# Altium PCB Telespore_Adapter.PcbDoc
Units mm, origin at the board's own origin, x right, y up, seen from the top; angles counter-clockwise.
Board outline 13.9 x 26 mm, 2 copper layers (Top Layer, Bottom Layer), stack 1.57 mm thick; 8 components, 19 nets, 41 pads, 74 vias.
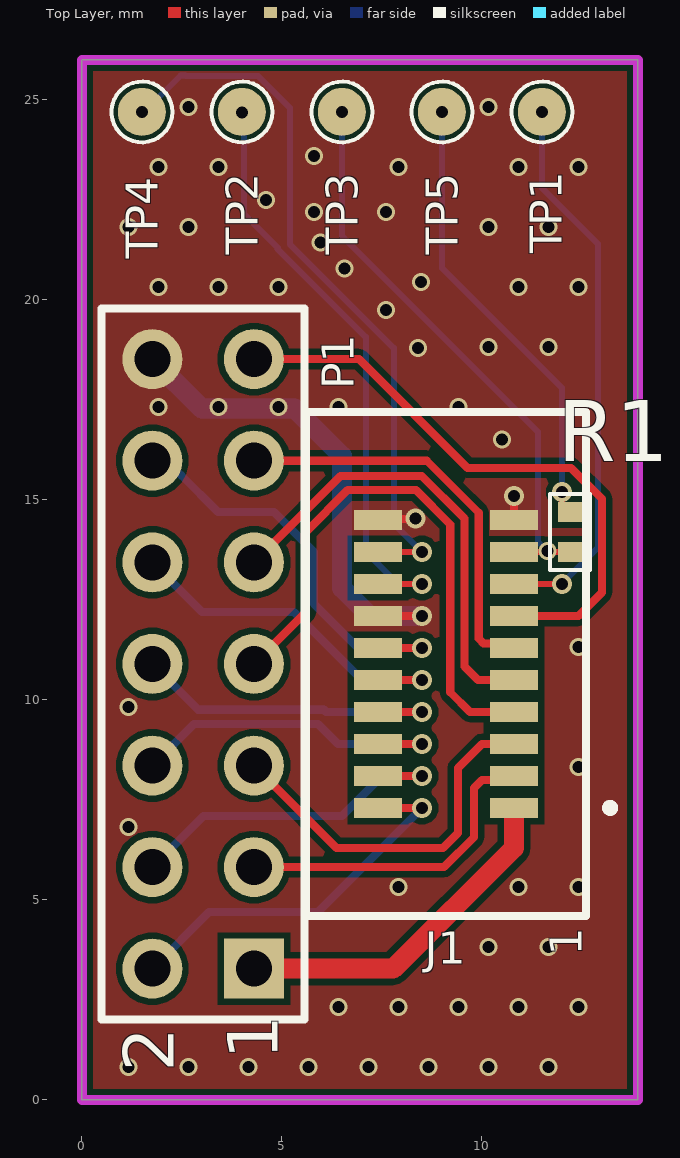
[diagram p0: Top Layer view]
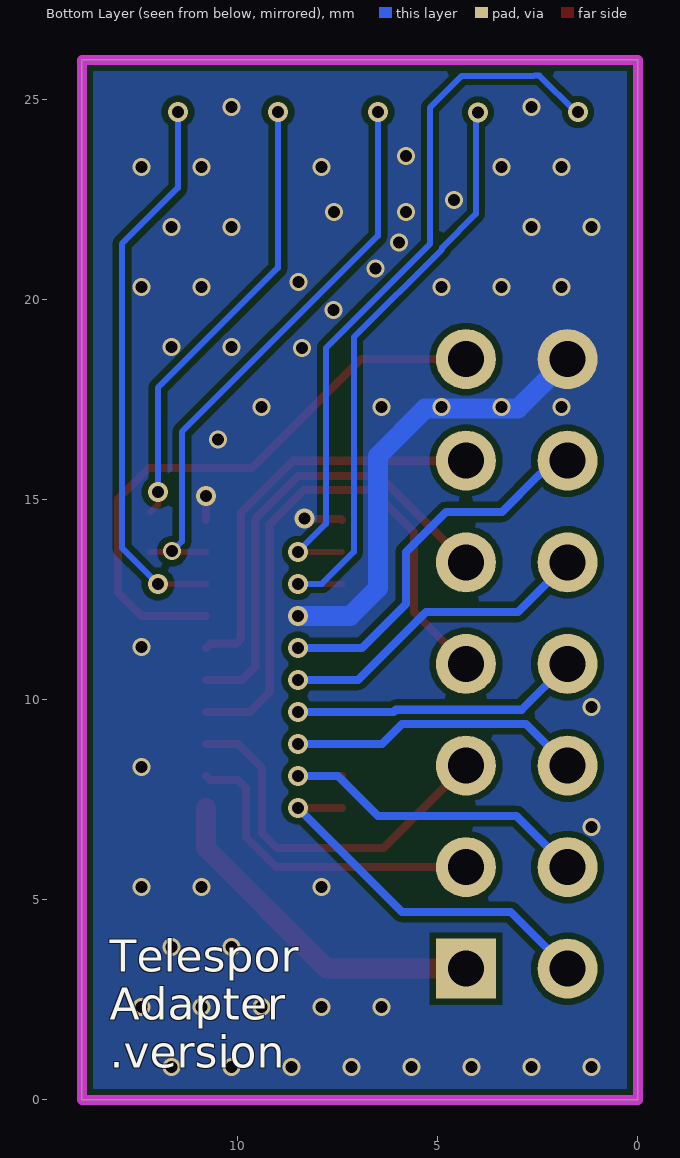
[diagram p1: Bottom Layer view, seen from below]

## Layer stack, top to bottom
Top Solder: solder mask 0.0102, Solder Resist, Dk 3.5
Top Layer: signal copper 0.035
Dielectric2: dielectric 1.5, FR-4, Dk 4.8
Bottom Layer: signal copper 0.035
Bottom Solder: solder mask 0.0102, Solder Resist, Dk 3.5

## Board outline
0,26 13.9,26 13.9,0 0,0

## Design rules (kind name [scope] priority, off if disabled: settings)
Clearance [All] p1: gap=0.152 ignorepadtopadclearanceinfootprint=FALSE except(0.15: SMDPad-SMDPad)
ComponentClearance [All] p1 off: gap=0 collisioncheckmode=3 verticalgap=2540 showdistances=FALSE
DiffPairsRouting [All] p1: maxlimit=0.153 minlimit=0.153 mostfreqgap=0.153 toplayer_minwidth=0.31 toplayer_maxwidth=0.31 toplayer_prefwidth=0.31 bottomlayer_minwidth=0.31 bottomlayer_maxwidth=0.31 bottomlayer_prefwidth=0.31 maxuncoupledlength=12.7
HoleSize [All] p1: absolutevalues=TRUE maxlimit=3 minlimit=0.3 maxpercent=80.000 minpercent=20.000
PolygonConnect [All] p1: connectstyle=Direct reliefconductorwidth=0.254 reliefentries=4 polygonreliefangle="90 Angle" airgapwidth=0.254
RoutingVias [All] p1: holewidth=0.3 width=0.5 viastyle="Through Hole" minholewidth=0.3 minwidth=0.5 maxholewidth=0.3 maxwidth=0.5
SilkToSilkClearance [All] p1: silktosilkclearance=0
SilkToSolderMaskClearance [IsPad] p1: minsilkscreentomaskgap=0.152 clearancetoexposedcopper=TRUE
SolderMaskExpansion [All] p1: expansion=0.102 istentingtop=FALSE
Width [All] p1: maxlimit=3 minlimit=0.152 preferedwidth=0.2
25 further rules are at their usual default settings.

## Components (designator, comment, footprint, x,y, rotation, side; value= is the part's Value field where it differs from the comment)
J1 "HSEC8-110-01-X-DV" SAMTEC_HSEC8-110-01-X-DV 9.1,10.9 r90 top
P1 "Header 7X2" HDR2X7 4.3,3.28 r90 top
R1 "100k" RES0402 12.2,14.2 r270 top
TP1 "TestPoint" TestPoint:1.2x1.2mm 11.5,24.7 r180 top
TP2 "TestPoint" TestPoint:1.2x1.2mm 4,24.7 r180 top
TP3 "TestPoint" TestPoint:1.2x1.2mm 6.5,24.7 r180 top
TP4 "TestPoint" TestPoint:1.2x1.2mm 1.5,24.7 r180 top
TP5 "TestPoint" TestPoint:1.2x1.2mm 9,24.7 r180 top

## Footprints (in the part's own frame and the unit in brackets; to place one, negate y for a bottom-side part, rotate by r counter-clockwise, add the part's x,y. Pads: shape width x height; smd on the part's side, far side on the other; paste and mask are expansions set on the pad)
HDR2X7 [mm] "Connector; Header; 7x2 Position"
  rect 1.5x1.5 hole 0.9: 1(0,0)
  round 1.5 hole 0.9: 2(0,2.54) 3(2.54,0) 4(2.54,2.54) 5(5.08,0) 6(5.08,2.54) 7(7.62,0) 8(7.62,2.54) 9(10.16,0) 10(10.16,2.54) 11(12.7,0) 12(12.7,2.54) 13(15.24,0) 14(15.24,2.54)
  silkscreen extent -1.27,-1.27 16.51,3.81
RES0402 [mm] "Chip Resistor, 2-Leads, Body 1.00x0.50mm, IPC Medium Density"
  rect 0.5x0.6 smd: 1(-0.5,0) 2(0.5,0)
  silkscreen extent -0.95,-0.5 0.95,0.5, body extent -0.5,-0.25 0.5,0.25, height 0.35
SAMTEC_HSEC8-110-01-X-DV [mm]
  rect 0.5x1.2 smd: 01(-3.6,-1.7) 02(-3.6,1.7) 03(-2.8,-1.7) 04(-2.8,1.7) 05(-2,-1.7) 06(-2,1.7) 07(-1.2,-1.7) 08(-1.2,1.7) 09(-0.4,-1.7) 10(-0.4,1.7) 11(0.4,-1.7) 12(0.4,1.7) 13(1.2,-1.7) 14(1.2,1.7) 15(2,-1.7) 16(2,1.7) 17(2.8,-1.7) 18(2.8,1.7) 19(3.6,-1.7) 20(3.6,1.7)
  silkscreen extent -6.3,-4.21 6.3,3.5, body extent -6.3,-3.5 6.3,3.5, height 7.8
TestPoint:1.2x1.2mm [mm]
  round 1.2 smd paste-10 mask+0: 0(0,0)
  silkscreen extent -0.76,-0.76 0.76,0.76

## Part data
J1: "20 Position Female Connector Non Specified - Dual Edge Gold 0.031 (0.80mm) Black", Package=None, Availability=Bad, Check_prices=https://www.snapeda.com/parts/HSEC8-110-01-L-DV/Samtec/view-part/3406415/?ref=eda, MF=Samtec, MP=HSEC8-110-01-L-DV, Price=None, Purchase-URL=https://pricing.snapeda.com/search/part/HSEC8-110-01-L-DV/?ref=eda, SnapEDA_Link=https://www.snapeda.com/parts/HSEC8-110-01-L-DV/Samtec/view-part/3406415/?ref=snap
P1: "Header, 7-Pin, Dual row", LatestRevisionDate=17-Jul-2002, LatestRevisionNote="Re-released for DXP Platform.", Publisher="Altium Limited"
R1: library part "R - 100k/0402", "MULTICOMP   MCWR04X1003FTL   RES, THICK FILM, 100KOHM, 1%, 0.0625W", Case Code (Imperial)=0402, Case Code (Metric)=1005, IRNAS Part No.=I-100013, Manufacturer=Multicomp, Manufacturer Part Number=MCWR04X1003FTL, Power Rating=62.5mW, Resistance=100kR, Supplier Part Number 1=2447094, Temperature Coefficient=100ppm/°C, Tolerance=1%, Voltage Rating=50V, Case/Package=0402, ComponentLink1Description=https://datasheet.ciiva.com/46386/1849611-46386524.pdf, ComponentLink1URL=https://datasheet.ciiva.com/46386/1849611-46386524.pdf, Composition="Thick Film", Mount="Surface Mount", Packaging="Cut Tape", Pricing 1="10=0.0029, 100=0.0017, 500=0.0012, 2500=0.001, 5000=0.0008 (EUR)", REACH SVHC="No SVHC", Stock 1=161188, Supplier 1=Farnell, Voltage Rating (DC)=50V
TP1 TP2 TP3 TP4 TP5: "TEST POINT ROUND SMD", ComponentLink1Description=Datasheet, FIT=0.94, Komp / Device=SMD

## Via types
v1: diameter 0.45, hole 0.3, Top Layer to Bottom Layer, tented both sides, 56 vias
v2: diameter 0.5, hole 0.3, Top Layer to Bottom Layer, tented both sides, 18 vias

## Nets (pads, with @x,y where several pads share a name; then routed paths per layer and width w, separated by ;. In a path a pad name is that pad's centre, name@x,y a point inside that pad or via, vN(x,y) a via of type N, cw(c..) or ccw(c..) an arc to the next point about the centre after c; other vN are vias at no path point)
+3V3: J1.08 P1.8 | length 8.3
  Top Layer w0.203: J1.08 v2(8.5,9.7)
  Bottom Layer w0.203: P1.8 2.904,9.756 6.047,9.756 6.103,9.7 v2(8.5,9.7)
+VBAT: J1.01 P1.1 | length 8.8
  Top Layer w0.5: P1.1 7.78,3.28 10.8,6.3 J1.01
GND: J1.14 J1.19 J1.20 P1.14 | length 14
  Top Layer w0.203: J1.14 v2(8.5,12.1) ; J1.20 7.419,14.519 8.319,14.519 v2(8.338,14.538) ; J1.19 v2(10.8,15.1)
  Bottom Layer w0.5: P1.14 2.997,17.283 5.317,17.283 6.5,16.1 6.5,12.8 7.2,12.1 v2(8.5,12.1)
  other v1: 1.165,0.826 2.665,0.826 4.165,0.826 5.665,0.826 7.165,0.826 8.665,0.826 10.165,0.826 11.665,0.826 6.415,2.326 7.915,2.326 9.415,2.326 10.915,2.326 12.415,2.326 10.165,3.826 11.665,3.826 7.915,5.326 10.915,5.326 12.415,5.326 1.165,6.826 12.415,8.326 1.165,9.826 12.415,11.326 10.498,16.506 1.915,17.326 3.415,17.326 4.915,17.326 6.415,17.326 9.415,17.326 8.4,18.8 10.165,18.826 11.665,18.826 7.606,19.745 1.915,20.326 3.415,20.326 4.915,20.326 10.915,20.326 12.415,20.326 8.483,20.447 6.561,20.79 5.968,21.43 1.165,21.826 2.665,21.826 10.165,21.826 11.665,21.826 5.8,22.2 7.6,22.2 4.6,22.5 1.915,23.326 3.415,23.326 7.915,23.326 10.915,23.326 12.415,23.326 5.8,23.6 2.665,24.826 10.165,24.826
MODEM_ACTIVE: J1.15 TP1.0 | length 14
  Top Layer w0.152: J1.15 v2(12,12.9)
  Bottom Layer w0.152: v2(11.5,24.7) 11.5,22.8 12.9,21.4 12.9,13.8 v2(12,12.9)
NetJ1_17: J1.17 R1.2 TP3.0 | length 14.5
  Top Layer w0.152: J1.17 12.15,13.7 R1.2
  Bottom Layer w0.152: v2(6.5,24.7) 6.5,21.6 11.4,16.7 11.4,13.961 v1(11.644,13.717)
NetJ1_18: J1.18 TP4.0 | length 18
  Top Layer w0.152: J1.18 v2(8.5,13.7)
  Bottom Layer w0.152: v2(1.5,24.7) 1.555,24.7 2.465,25.609 2.591,25.609 2.6,25.6 4.4,25.6 5.2,24.8 5.2,21.397 7.8,18.797 7.8,14.4 v2(8.5,13.7)
NetR1_1: R1.1 TP5.0 | length 11.3
  Top Layer w0.152: v2(12,15.2) 12,14.874 12.174,14.7 R1.1
  Bottom Layer w0.152: v2(9,24.7) 9,20.8 12,17.8 v2(12,15.2)
nRF52_RESET: J1.04 P1.4 | length 8.8
  Top Layer w0.203: J1.04 v2(8.5,8.1)
  Bottom Layer w0.203: P1.4 3.04,7.1 6.5,7.1 7.5,8.1 v2(8.5,8.1)
nRF52_SWDCLK: J1.02 P1.2 | length 9.5
  Top Layer w0.203: J1.02 v2(8.5,7.3)
  Bottom Layer w0.203: P1.2 3.18,4.7 5.9,4.7 v2(8.5,7.3)
nRF52_SWDIO: J1.03 P1.3 | length 8.2
  Top Layer w0.203: P1.3 9.053,5.82 9.8,6.567 9.8,7.8 10,8 10.7,8 J1.03
nRF91_RESET: J1.11 P1.11 | length 10.3
  Top Layer w0.203: P1.11 8.62,15.98 9.92,14.68 9.92,11.533 10.039,11.414 10.686,11.414 J1.11
nRF91_SWDCLK: J1.13 P1.13 | length 14.9
  Top Layer w0.203: P1.13 6.923,18.52 9.643,15.8 12.23,15.8 13,15.03 13,12.686 12.414,12.1 J1.13
nRF91_SWDIO: J1.12 P1.12 | length 10.5
  Top Layer w0.203: J1.12 v2(8.5,11.3)
  Bottom Layer w0.203: P1.12 2.111,15.98 2.474,15.617 2.483,15.617 3.4,14.7 4.8,14.7 5.8,13.7 5.8,12.4 6.9,11.3 v2(8.5,11.3)
P0.04_TxD: J1.09 P1.9 | length 11.7
  Top Layer w0.203: P1.9 6.46,15.6 8.497,15.6 9.564,14.533 9.564,10.836 9.9,10.5 J1.09
P0.06_RxD: J1.10 P1.10 | length 9.1
  Top Layer w0.203: J1.10 v2(8.5,10.5)
  Bottom Layer w0.203: P1.10 3,12.2 5.3,12.2 7,10.5 v2(8.5,10.5)
VDD_GPS_LNA: J1.07 P1.7 | length 14.2
  Top Layer w0.203: P1.7 5.6,12.2 5.6,14.2 6.644,15.244 8.35,15.244 9.209,14.385 9.209,10.191 9.7,9.7 J1.07
VDD_RF_SW: J1.16 TP2.0 | length 15.1
  Top Layer w0.152: v2(4,24.691) TP2.0 ; J1.16 v2(8.5,12.9)
  Bottom Layer w0.152: v2(4,24.691) 4.051,24.64 4.051,22.149 4.896,21.304 4.896,21.27 7.1,19.066 7.1,13.7 7.9,12.9 v2(8.5,12.9)
VGPS: J1.06 P1.6 | length 8.5
  Top Layer w0.203: J1.06 v2(8.5,8.9)
  Bottom Layer w0.203: P1.6 2.8,9.4 5.9,9.4 6.4,8.9 v2(8.5,8.9)
VLORA: J1.05 P1.5 | length 9.4
  Top Layer w0.203: P1.5 6.36,6.3 9.03,6.3 9.4,6.67 9.4,8.3 10,8.9 J1.05

## Polygon pours and split planes (outlines as drawn)
GND on Bottom Layer "GND_L02_P000" (solid, remove dead copper, pour order 0): 0,0 0,26 13.9,26 13.9,0
GND on Top Layer "GND_L01_P001" (solid, remove dead copper, pour order 1): 0,0 13.9,0 13.9,26 0,26

## Keep-outs
Keep-Out Layer:
  the board outline again, w0.254

## Silkscreen, mask and mechanical layers (free items; w line width, h text height)
Top Overlay:
  text "1" at 12.5,3.6 h0.8 r90
Bottom Overlay:
  text "Telespor / Adapter / .version" at 13.2,0.8 h0.8
Mechanical 13:
  drawing of 1098 lines, arcs and shapes, not listed
  text ".Website" at 236.933,-94.322 h2.5
  text ".Company" at 212.433,-94.472 h2.5
  text ".ProjectTitle" at 212.433,-97.822 h2.5
  text ".PCBDesigner" at 212.333,-101.272 h2.5
  text ".Version" at 212.533,-104.622 h2.5
  text ".RevisionDate" at 212.433,-108.172 h2.5
Mechanical 14:
  drawing of 1099 lines, arcs and shapes, not listed
  text ".Company" at -96.717,-94.322 h2.5
  text ".Website" at -120.717,-94.372 h2.5
  text ".ProjectTitle" at -96.717,-97.672 h2.5
  text ".PCBDesigner" at -96.717,-101.122 h2.5
  text ".Version" at -96.717,-104.822 h2.5
  text ".RevisionDate" at -96.717,-108.022 h2.5

## Dimensions
0,0 to 13.9,0 on Mechanical 1
0,0 to 0,26 on Mechanical 1

## Text inside footprints (layer, text, board x,y; h text height)
P1: Top Overlay "2" at 2.3,0.7 h1.27 r90; Top Overlay "1" at 4.9,1 h1.27 r90